# EAGLE board bacteria-pcb v38 (EAGLE 9.7.0)
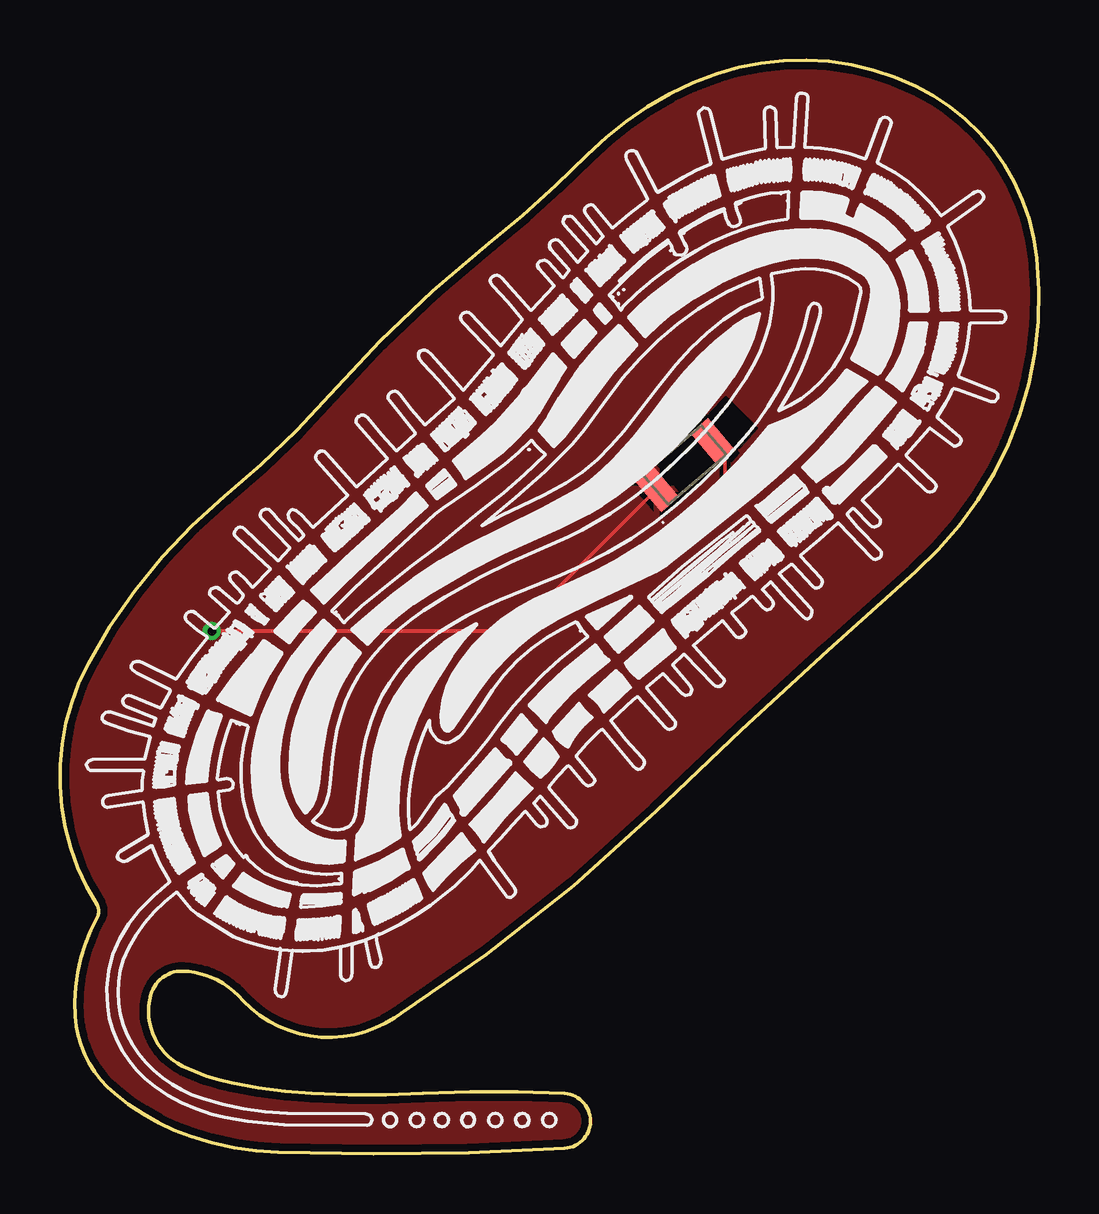
[diagram p0: board, top side]
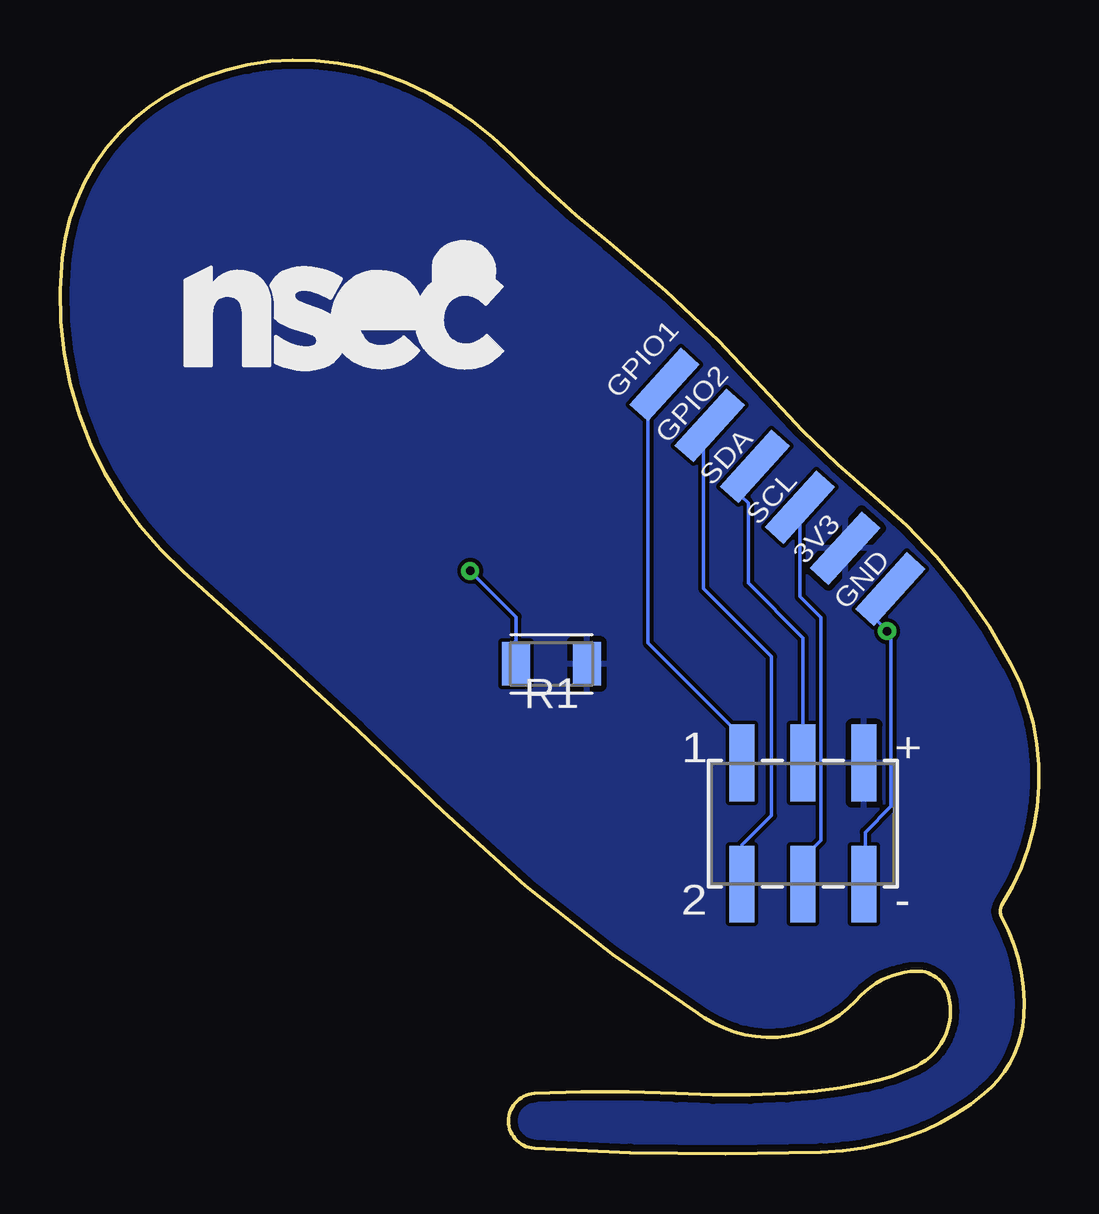
[diagram p1: board, bottom side, seen from below]

Size 40.81 x 45.6 mm. Coordinates in mm from the lower left corner, seen from the top.
Outline: 5.12,3.66 arc14 7.17,2.96 arc8 10.5,2.51 arc7 15.13,2.51 arc-7 21.04,2.51 arc-173 21.04,0.23 arc-5 9.1,0.07 arc-17 5.45,0.73 arc-21 2.27,2.51 arc-47 0.63,5.74 arc-32 1.55,9.86 arc57 1.55,10.37 arc-60 1.17,20.42 arc-22 6.85,27.39 arc9 11.25,31.65 arc-10 17.89,37.96 arc7 22,41.66 arc-27 27.39,45.02 arc-44 35.67,44.51 arc-58 40.73,37.33 arc-55 35.67,24.27 arc2 24.85,14.28 arc-11 13.96,5.68 arc-79 7.63,6.38 arc28 6.3,7.36 arc21 5.12,7.62 arc77 3.78,6.64 arc79 5.12,3.66
Copper layers (1*16): Top 0.035mm / dielectric 1.5mm / Bottom 0.035mm
Design rules "default *": minimum track width 6mil, minimum drill 0.35mm, track to track 6mil, track to pad 6mil, pad to pad 6mil, via to via 6mil, smd to smd 6mil, copper to edge 0.3mm, drill to drill 6mil, minimum pad ring 10mil, minimum via ring 8mil, stop-mask expansion 4mil, vias tented up to drill 0mil, thermal gap 10mil
tRestrict: area 24.8,27.4 to 27.2,30; area 27.1,29.5 to 29,31.5; area 28,28.9 to 28.3,29.2

## Footprints (pad centres in the part's own frame; a part is rotated, then mirrored left to right if it is on the bottom)
LEDC3216X75N_FLAT-R = smd 0.962 x 1.712: A 1.525,0; C -1.525,0
CONN6_M20-8760342_HRW = smd 1.041 x 3.2: 1 -2.54,2.525; 2 -2.54,-2.525; 3 0,2.525; 4 0,-2.525; 5 2.54,2.525; 6 2.54,-2.525
SAOPADBREAKOUT = smd 1.041 x 3.2: 1 -6.35,0; 2 -3.81,0; 3 -1.27,0; 4 1.27,0; 5 3.81,0; 6 6.35,0
RESC3216X70 = smd 1.165 x 1.815: 1 -1.475,0; 2 1.475,0

## Placement (x,y rotation side)
D1  LED_RED  [LEDC3216X75N_FLAT-R]  26.04,28.72 40.5 top
J1  M20-8760342CONN6_M20-8760342_HRW  [CONN6_M20-8760342_HRW]  9.84,13.77 0 bottom
J2  SAOPADBREAKOUT  [SAOPADBREAKOUT]  10.9,27.81 317.8 bottom
R1  [RESC3216X70]  20.32,20.43 180 bottom

## Library data of the parts
D1 = led; CATEGORY: LED; COLOR: RED; DESCRIPTION: CHIP LED FLAT; SUB-CATEGORY: CHIP; TYPE: FLAT_TOP
J1 = Library; COPYRIGHT: Copyright (C) 2024 Ultra Librarian. All rights reserved.; MANUFACTURER_PART_NUMBER: M20-8760342; MFR_NAME: Harwin
J2 = Library
R1 = Resistor; CATEGORY: Resistor; SUB-CATEGORY: Fixed

## Nets
3V3: J1.5 J2.5 R1.1
GND: D1.C J1.6 J2.6
GPIO1: J1.1 J2.1
GPIO2: J1.2 J2.2
N$1: D1.A R1.2
SCL: J1.4 J2.4
SDA: J1.3 J2.3

## Tracks (layer width: path | path; a pad name or v marks a point on that pad's centre or on a via)
3V3
  pour Bottom: 62.19,-42.23 62.22,-42.24 62.4,-42.42 62.4,59.78 62.41,59.8 63.22,60.61 63.22,67.44 63.21,67.45 63.2,67.48 63.2,67.49 -12.77,67.49 -12.77,-38.07 -8.61,-42.23
GND  (via drill 0.35)
  Top 0.152: v6.33,21.79 18.98,21.79 24.77,27.58 D1.C
  Bottom 0.152: J1.6 7.24,11.27 7.24,13.41 6.18,14.47 6.18,21.64 v6.33,21.79 6.79,22.25 6.79,23.01 6.33,23.47 J2.6
  pour Top: -3.5,-2.35 50.49,-22.92 56.03,51.32 52.27,55.09 -3.5,55.09
GPIO1
  Bottom 0.152: 16.23,30.78 16.23,31.39 15.62,32 J2.1 16.3,31.38 16.3,21.29 12.38,17.37 J1.1 12.42,16.3
GPIO2
  Bottom 0.152: 12.42,11.27 J1.2 12.38,12.88 11.15,14.1 11.15,20.73 13.98,23.56 13.98,29.91 13.73,30.16 J2.2 13.19,30.91 13.19,31.54 13.15,31.54
N$1  (via drill 0.35)
  Top 0.152: v23.71,24.3 24.21,24.3 27.71,27.8 27.71,29.19 D1.A
  Bottom 0.152: 21.87,21.33 21.87,20.57 R1.2 21.8,22.38 v23.71,24.3
SCL
  Bottom 0.152: 8.77,27.73 9.07,27.73 9.83,26.97 J2.4 9.96,23.23 9.09,22.36 9.09,13.07 9.74,12.41 J1.4 9.83,11.27
SDA
  Bottom 0.152: J1.3 9.83,21.5 12.12,23.79 12.12,27.12 12.42,27.43 12.42,28.19 11.97,28.65 J2.3

## Text on the board
bStop: bacteria